# EAGLE board offtimer_with_drill (EAGLE 9.6.2)
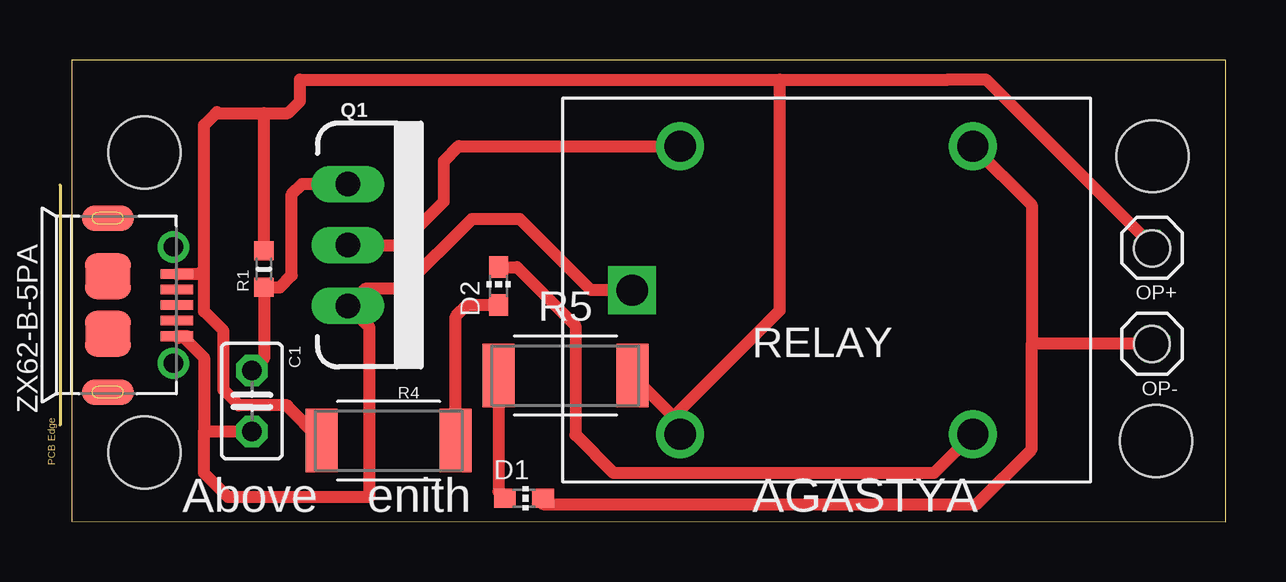
[diagram p0: board, top side]
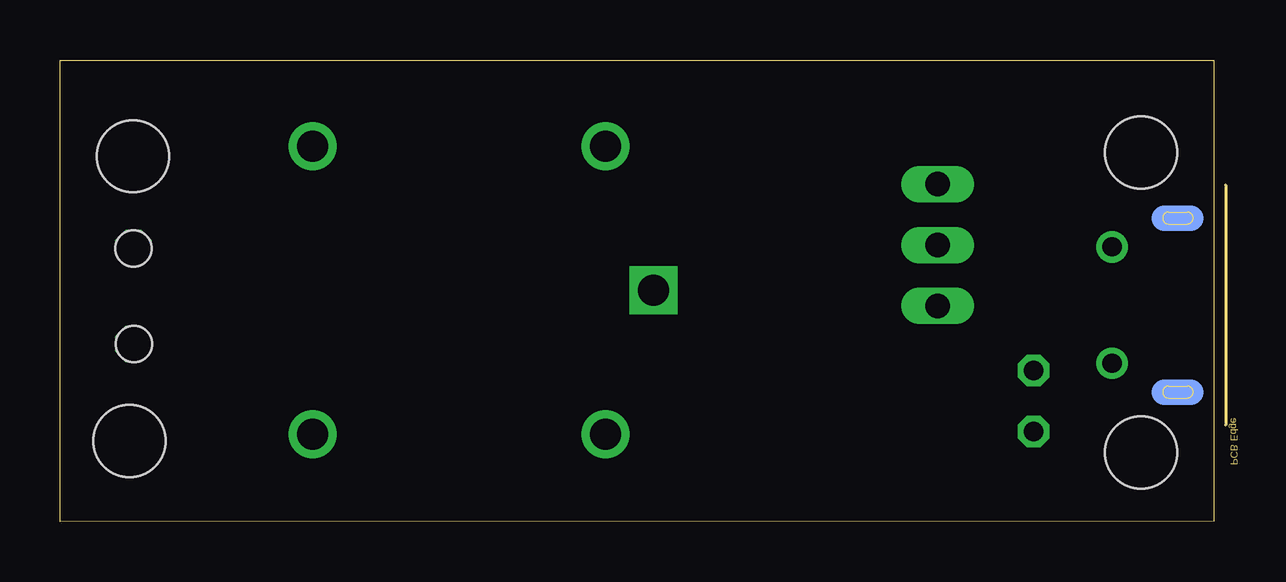
[diagram p1: board, bottom side, seen from below]

Size 48.09 x 19.23 mm. Coordinates in mm from the lower left corner, seen from the top.
Outline: 0,0.02 48.09,0 48.09,19.21 0,19.23 0,0.02
Copper layers (1*16): Top 0.035mm / dielectric 1.5mm / Bottom 0.035mm
Design rules "default *": minimum track width 6mil, minimum drill 0.35mm, track to track 6mil, track to pad 6mil, pad to pad 6mil, via to via 6mil, smd to smd 6mil, copper to edge 0mil, drill to drill 6mil, minimum pad ring 10mil, minimum via ring 8mil, stop-mask expansion 4mil, vias tented up to drill 0mil, thermal gap 10mil
Holes 1.5 mm at 45.02,11.38 45.01,7.4
Holes 3 mm at 3.02,15.38 3.02,2.88 45.19,3.35 45.04,15.22

## Footprints (pad centres in the part's own frame; a part is rotated, then mirrored left to right if it is on the bottom)
C025-025X050 = drill 0.813 octagon: 1 -1.27,0; 2 1.27,0
LED_CHIP-LED0603MP = smd 0.8 x 0.9: A 0,-0.794; C 0,0.794
1X01 = drill 1.016 octagon: 1 0,0
TO220V = drill 1.016 long: 1 -2.54,0; 2 0,0; 3 2.54,0
RC-MASTER-SMD_R0603MP = smd 0.8 x 0.8: 1 -0.762,0; 2 0.762,0
RESMELF5924 = smd 1.326 x 2.65: 1 -2.795,0; 2 2.795,0
JSM1-12V-5 = drill 1.3 pad 2 square: 1 8.1,0 | drill 1.3 pad 2: 2 6.1,6; 3 -6.1,6; 4 -6.1,-6; 5 6.1,-6
MICRO-USB5+6P-SMD-0.65-AB = smd 0.4 x 1.35: 1 -1.3,2.875; 2 -0.65,2.875; 3 0,2.875; 4 0.65,2.875; 5 1.3,2.875 | smd 1.9 x 1.9: P1 -1.2,0; P2 1.2,0 | smd 1.067 x 2.184 bottom: P3B -3.625,0; P4B 3.625,0 | smd 1.067 x 2.184: P3T -3.625,0; P4T 3.625,0 | drill 0.8: P5 -2.425,2.73; P6 2.425,2.73

## Placement (x,y rotation side)
C1  [C025-025X050]  7.5,5.02 270 top
D1  [LED_CHIP-LED0603MP]  18.84,0.97 270 top
D2  [LED_CHIP-LED0603MP]  17.78,9.81 0 top
OP+  [1X01]  45.02,11.4 0 top
OP-  [1X01]  45.02,7.4 0 top
Q1  60V/32A/35mΩ  [TO220V]  11.5,11.52 270 top
R1  1M  [RC-MASTER-SMD_R0603MP]  8,10.52 90 top
R4  10k  [RESMELF5924]  13.2,3.37 180 top
R5  10k  [RESMELF5924]  20.57,6.08 0 top
RELAY  JSM1-12V-5  [JSM1-12V-5]  31.45,9.64 180 top
USB1  ZX62-B-5PA  [MICRO-USB5+6P-SMD-0.65-AB]  1.5,9.02 270 top

## Library data of the parts
C1 = BeagleBone_Black_Wireless
D1 D2 R1 = 52101-101-REV-A_v16
OP+ OP- = pinhead
Q1 = SparkFun-DiscreteSemi; PROD_ID: TRANS-10060
R4 R5 = Resistor; CATEGORY: Resistor; SUB-CATEGORY: Fixed
RELAY = Relay; CREATED_BY: PCBLayout.com; DIGIKEY_PARTNO: 255-1240-ND; MANUFACTURER: Panasonic Electric Works; MPN: JSM1-12V-5
USB1 = OPL_Connector; MPN: ZX62-B-5PA

## Nets
GND: C1.2 Q1.3 RELAY.1 USB1.5
N$1: Q1.2 RELAY.5
N$2: D1.C OP-.1 RELAY.4
N$3: C1.1 Q1.1 R1.1
N$4: D1.A R5.1
N$5: D2.A R4.1
N$6: D2.C RELAY.3
VBUS: OP+.1 R1.2 R4.2 R5.2 RELAY.2 USB1.1

## Tracks (layer width: path | path; a pad name or v marks a point on that pad's centre or on a via)
GND
  Top 0.508: 4.8,7.72 USB1.5 4.44,7.66 4.67,7.66 5.5,6.83 5.5,3.75 | 5.5,3.75 C1.2 | 5.5,3.75 5.5,2.02 6.5,1.02 12.39,1.02 12.39,8.09 Q1.3 12.21,9.69 13.76,9.69 16.67,12.6 18.68,12.6 21.63,9.64 RELAY.1
N$1
  Top 0.508: Q1.2 13.68,11.52 15.5,13.34 15.5,15.02 16.12,15.64 RELAY.5
N$2
  Top 0.508: 40,7.4 40,3.02 37.7,0.72 19.64,0.72 D1.C | OP-.1 40,7.4 | RELAY.4 40,13.19 40,7.4
N$3
  Top 0.508: Q1.1 9.58,14.06 9.17,13.65 9.17,10.26 8.67,9.76 R1.1 8,6.79 C1.1
N$4
  Top 0.508: R5.1 17.78,1.24 D1.A
N$5
  Top 0.508: D2.A 16.47,9.02 16,8.54 R4.1
N$6
  Top 0.508: RELAY.3 35.93,2.02 22.58,2.02 20.99,3.61 20.99,8.17 18.55,10.61 D2.C
VBUS
  Top 0.508: 4.4,10.3 USB1.1 5.3,10.32 5.5,10.52 | 5.5,10.52 5.5,16.52 6,17.02 | 6,17.02 6.04,17.06 | 29.5,18.42 9.5,18.42 9.5,17.52 9,17.02 8,17.02 | 29.5,18.42 36.5,18.42 36.5,18.43 38.1,18.43 45.02,11.5 OP+.1 | 8.99,4.84 8.95,4.84 | 8.95,4.84 6.97,4.84 6.32,5.48 6.32,7.94 5.5,8.76 5.5,10.52 | RELAY.2 25.87,4.16 25.29,4.16 | 29.5,18.42 29.5,8.8 24.86,4.16 25.29,4.16 | 6,17.02 8,17.02 | R1.2 8,17.02 | R4.2 8.95,4.84 | R5.2 25.29,4.16

## Text on the board
tPlace: Above Ẑenith | AGASTYA